# Allegro board remotepanasonicDB9-rout-V2-0.brd
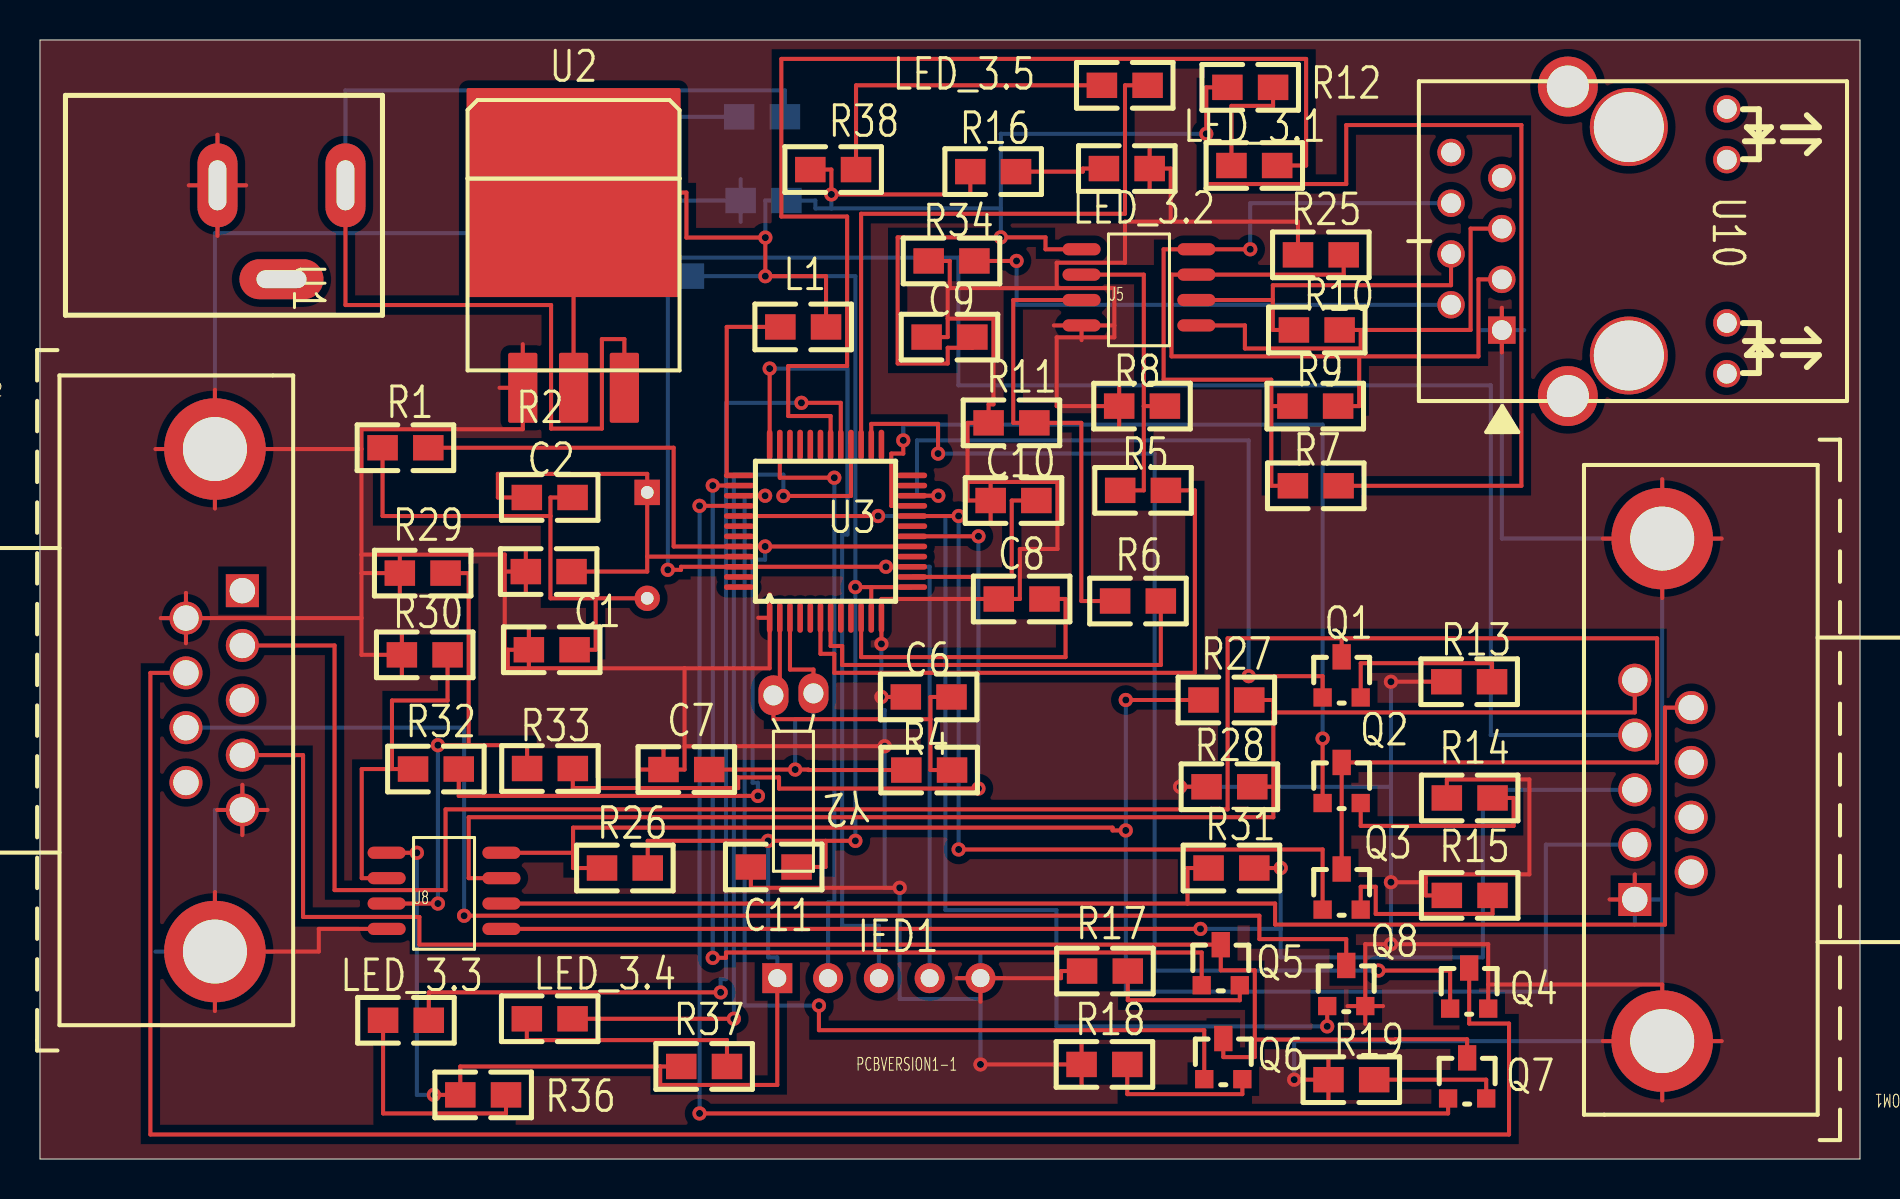
[diagram p0: board, top side]
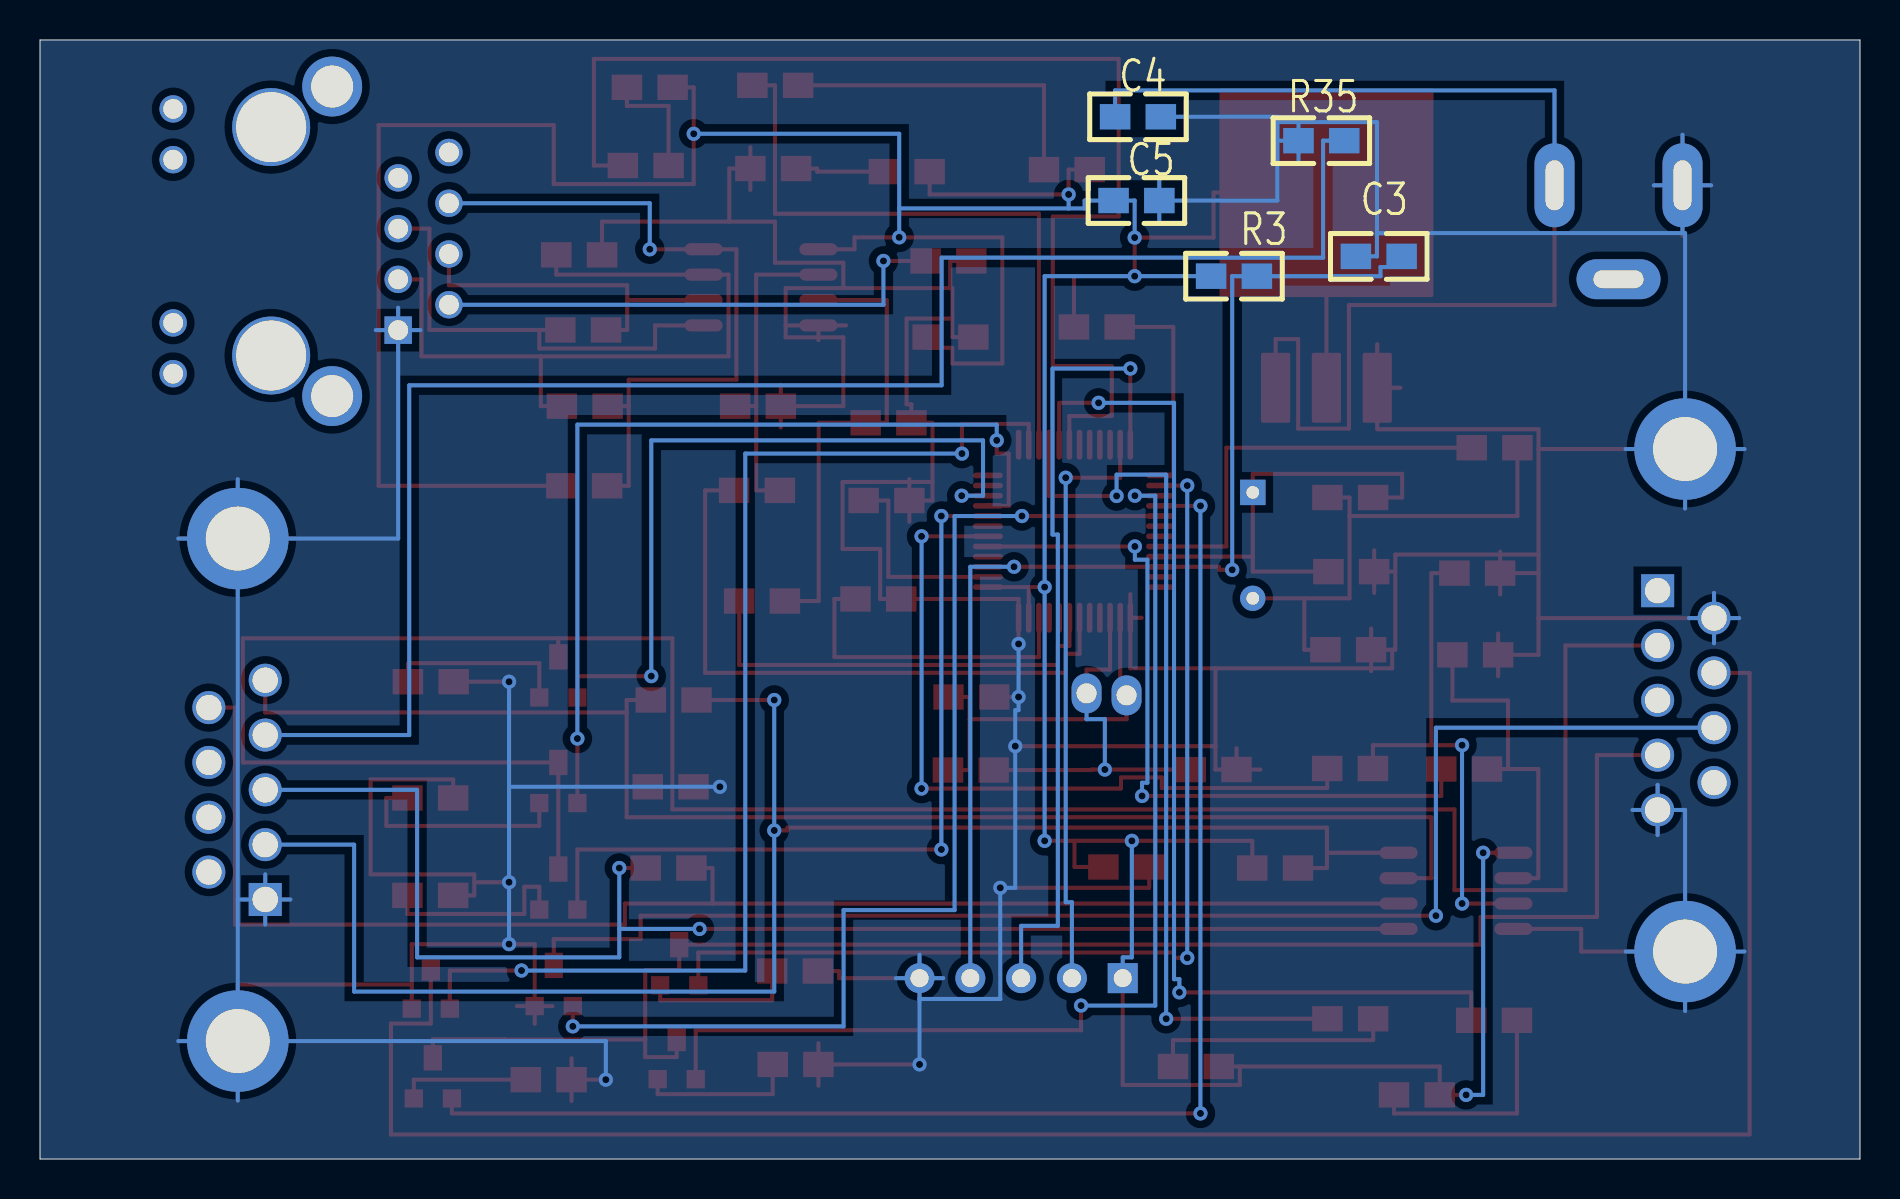
[diagram p1: board, bottom side, seen from below]

Outline 91 x 56 mm; copper layers: TOP, BOTTOM. Coordinates in mm from the lower left corner of the outline.
Outline path: 0,56 91,56 91,0 0,0 0,56

## Placement (name value [footprint] x y rotation side)
C1  20p  [0805]  25.59 25.49 0 top
C2  20p  [0805]  25.43 29.4 0 top
C3  10u  [0805]  24.06 45.17 180 bottom
C4  10u  [0805]  36.1 52.16 180 bottom
C5  22u  [0805]  36.18 47.96 180 bottom
C6  20p  [0805]  44.43 23.12 0 top
C7  20p  [0805]  32.32 19.49 0 top
C8  10u  [0805]  49.08 28.03 0 top
C9  0.1u  [0805]  45.47 41.13 0 top
C10  0.1u  [0805]  48.68 32.95 0 top
C11  0.1u  [0805]  36.69 14.61 0 top
COM1  BOXCONN_DB9  [DB9RA_M]  79.74 18.47 180 top
COM2  BOXCONN_DB9  [DB9RA_M]  10.12 22.96 0 top
IED1  <Value>  [HDR1X5]  36.86 9.05 0 top
L1  R0  [0805]  38.16 41.64 0 top
LED_3.1  RED  [0805]  60.71 49.72 0 top
LED_3.2  RED  [0805]  54.34 49.56 0 top
LED_3.3  RED  [0805]  18.3 6.94 0 top
LED_3.4  RED  [0805]  25.48 7.02 0 top
LED_3.5  RED  [0805]  54.24 53.73 0 top
Q1  2N7002LT1  [SOT23_B]  65.08 24.09 0 top
Q2  2N7002LT1  [SOT23_B]  65.08 18.81 0 top
Q3  2N7002LT1  [SOT23_B]  65.08 13.47 0 top
Q4  2N7002LT1  [SOT23_B]  71.46 8.52 0 top
Q5  2N7002LT1  [SOT23_B]  59.04 9.69 0 top
Q6  2N7002LT1  [SOT23_B]  59.17 4.99 0 top
Q7  2N7002LT1  [SOT23_B]  71.36 4.02 0 top
Q8  2N7002LT1  [SOT23_B]  65.31 8.65 0 top
R1  33  [0805]  18.27 35.59 0 top
R2  1M  [0805]  25.48 33.11 0 top
R3  10k  [0805]  31.3 44.18 180 bottom
R4  10M  [0805]  44.46 19.47 0 top
R5  22  [0805]  55.15 33.46 0 top
R6  22  [0805]  54.9 27.92 0 top
R7  4.7k  [0805]  63.79 33.69 0 top
R8  10k  [0805]  55.1 37.68 0 top
R9  100  [0805]  63.76 37.68 0 top
R10  100  [0805]  63.84 41.49 0 top
R11  10k  [0805]  48.57 36.84 0 top
R12  330  [0805]  60.51 53.63 0 top
R13  4.7k  [0805]  71.46 23.89 0 top
R14  10k  [0805]  71.48 18.07 0 top
R15  15k  [0805]  71.48 13.19 0 top
R16  330  [0805]  47.66 49.41 0 top
R17  4.7k  [0805]  53.25 9.41 0 top
R18  10k  [0805]  53.22 4.73 0 top
R19  15k  [0805]  65.57 3.97 0 top
R25  4.7k  [0805]  64.04 45.25 0 top
R26  4.7k  [0805]  29.24 14.56 0 top
R27  100  [0805]  59.32 22.97 0 top
R28  4.7k  [0805]  59.47 18.63 0 top
R29  10k  [0805]  19.13 29.32 0 top
R30  10k  [0805]  19.24 25.23 0 top
R31  100  [0805]  59.57 14.56 0 top
R32  22  [0805]  19.8 19.52 0 top
R33  22  [0805]  25.5 19.54 0 top
R34  0  [0805]  45.58 44.94 0 top
R35  0  [0805]  26.93 50.96 180 bottom
R36  330  [0805]  22.16 3.21 0 top
R37  330  [0805]  33.21 4.63 0 top
R38  330  [0805]  39.66 49.51 0 top
U1  DC205A  [DC205]  15.27 48.73 270 top
U2  AMS1086CM-3.3  [TO262]  26.68 45.09 0 top
U3  NUC122LC1AN  [NUC122LQFP48]  36.48 27.09 0 top
U5  MAX3488  [SOP8]  52.08 45.53 0 top
U8  MAX3488  [SOP8]  17.33 15.33 0 top
U10  RJ45  [HR911105A]  68.94 45.93 270 top
Y1  12M  [XALTDIP2]  30.36 33.36 270 top
Y2  32k  [XTAL-3_4MM-2P]  38.97 23.4 180 top

## Library data of the parts
C1-C3 C6-C11 = CAPACITOR NON-POL
C4 C5 = CAP NP
COM1 COM2 = CONNECTOR DB9_1
IED1 = CON5
L1 R1-R11 R13-R15 R17-R19 R25-R35 = R
LED_3.1-LED_3.5 = LED
Q1-Q8 = NPN_3
R12 R16 R36-R38 = RES1
U1 = DC205A
U2 = AMS1117: Tolerance: RichardLC; User Part Number: pn
U3 = NUC122LC1AN
U5 U8 = MAX485
U10 = RJ45
Y1 Y2 = CRYSTAL

## Footprints (pads in the part's own frame, mm; a bottom-side part is the same pattern mirrored in y, then rotated)
0805
  rect 1.524x1.27 smd: 1(-1.143,0) 2(1.143,0)
DB9RA_M
  rect 1.651x1.651 hole 1.27: 1(0,5.486)
  round 1.651 hole 1.27: 2(0,2.743) 3(0,0) 4(0,-2.743) 5(0,-5.486) 6(-2.819,4.115) 7(-2.819,1.372) 8(-2.819,-1.372) 9(-2.819,-4.115)
  round 5.08 hole 3.2: 10(-1.372,12.573) 11(-1.372,-12.573)
DC205
  oval 4.2x2 hole 2.5x0.889: 1(0,0) 2(0,-6.4)
  oval 2x4.2 hole 0.889x2.5: 3(4.7,-3.2)
HDR1X5
  rect 1.5x1.5 hole 0.9: 1(0,0)
  round 1.5 hole 0.9: 2(2.54,0) 3(5.08,0) 4(7.62,0) 5(10.16,0)
HR911105A
  round 3.9 hole 3.5 unplated: (-5.707,10.498) (5.723,10.498)
  rect 1.372x1.372 hole 0.991: 1(4.453,4.148)
  round 1.372 hole 0.991: 2(3.183,1.608) 3(1.913,4.148) 4(0.643,1.608) 5(-0.627,4.148) 6(-1.897,1.608) 7(-3.167,4.148) 8(-4.437,1.608) 9(6.633,15.398) 10(4.093,15.398) 11(-4.077,15.398) 12(-6.617,15.398)
  round 2.997 hole 2.1: M3(-7.737,7.448) M4(7.753,7.448)
NUC122LQFP48
  oval 0.279x1.5 smd: 1(0,0) 2(0.508,0) 3(1.016,0) 4(1.524,0) 5(2.032,0) 6(2.54,0) 7(3.048,0) 8(3.556,0) 9(4.064,0) 10(4.572,0) 11(5.08,0) 12(5.588,0) 25(5.588,8.66) 26(5.08,8.66) 27(4.572,8.66) 28(4.064,8.66) 29(3.556,8.66) 30(3.048,8.66) 31(2.54,8.66) 32(2.032,8.66) 33(1.524,8.66) 34(1.016,8.66) 35(0.508,8.66) 36(0,8.66)
  oval 1.5x0.279 smd: 13(7.124,1.536) 14(7.124,2.044) 15(7.124,2.552) 16(7.124,3.06) 17(7.124,3.568) 18(7.124,4.076) 19(7.124,4.584) 20(7.124,5.092) 21(7.124,5.6) 22(7.124,6.108) 23(7.124,6.616) 24(7.124,7.124) 37(-1.536,7.124) 38(-1.536,6.616) 39(-1.536,6.108) 40(-1.536,5.6) 41(-1.536,5.092) 42(-1.536,4.584) 43(-1.536,4.076) 44(-1.536,3.568) 45(-1.536,3.06) 46(-1.536,2.552) 47(-1.536,2.044) 48(-1.536,1.536)
SOP8
  oval 1.905x0.61 smd: 1(0,0) 2(0,-1.27) 3(0,-2.54) 4(0,-3.81) 5(5.74,-3.81) 6(5.74,-2.54) 7(5.74,-1.27) 8(5.74,0)
SOT23_B
  rect 0.914x1.27 smd: D(0,1.041)
  rect 0.914x0.914 smd: G(-0.953,-0.991) S(0.953,-0.991)
TO262
  custom 1.46x3.5 smd: 1(-2.54,-6.5) 2(0,-6.5) 3(2.54,-6.5)
  custom 10.7x10.46 smd: 4(0,3.27)
XALTDIP2
  rect 1.27x1.27 hole 0.635: 1(0,0)
  round 1.27 hole 0.635: 2(5.3,0)
XTAL-3_4MM-2P
  oval 1.5x2 hole 1: 1(0.3,0.1) 2(2.3,0.2)

## Nets
GND: C1.1 C2.1 C3.1 C4.2 C5.2 C6.1 C7.1 C8.1 C9.1 C10.1 C11.1 COM1.1 COM1.10 COM1.11 COM2.5 COM2.6 COM2.10 COM2.11 IED1.5 LED_3.2.2 Q4.S Q8.S R8.1 R11.1 R13.1 R14.1 R15.1 R17.1 R18.1 R19.1 R25.1 R28.1 R29.1 R30.1 R34.1 R35.1 U1.2(GND) U2.1(GND) U3.1(PVSS) U3.12(VSS) U5.4(GND) U8.4(GND) U10.1
VCC: C5.1 C9.2 C11.2 IED1.1 L1.2 R3.1 R7.2 R12.1 R16.1 R26.2 R36.1 R37.1 R38.1 U2.2(VOUT) U2.4(TAB) U3.11(VDD) U3.13(VBUS) U5.1(VCC) U8.1(VCC)
VCC5: C4.1 U1.1(VCC) U2.3(VIN)
422AI: R7.1 R9.1 U5.8(A) U10.6
422AO: COM1.2 R26.1 R27.1 U8.8(A)
422BI: R9.2 R25.2 U5.7(B) U10.3
422BO: COM1.5 R27.2 R28.2 U8.7(B)
422YI: R10.2 U5.5(Y) U10.5
422YO: COM1.3 R31.2 U8.5(Y)
422ZI: R10.1 U5.6(Z) U10.4
422ZO: COM1.9 R31.1 U8.6(Z)
A_AUDIO: COM2.7 Q4.D
A_AUDIO-1: COM2.8 Q8.D
A_INPUT: Q4.G U3.26(PC12)
A_INPUT1: Q8.G U3.41(PD3)
B_AUDIO: COM2.2 Q1.D Q2.D Q3.D
B_AUDIO-1: COM2.4 Q5.D Q6.D Q7.D
B_NET1: Q1.G U3.22(PC0/SPISS00)
B_NET2: Q2.G U3.21(PC1/SPICLK0)
B_NET3: Q3.G U3.20(PC2/MISO00)
B_NET11: Q5.G U3.38(PD0)
B_NET21: Q6.G U3.39(PD1)
B_NET31: Q7.G U3.40(PD2)
ICECLK: IED1.3 U3.36(ICE_CK)
ICEDATA: IED1.2 U3.35(ICE_DAT)
ICEREST: C3.2 IED1.4 R3.2 U3.46(/RESET)
PC8: LED_3.1.2 U3.30(PC8/SPISS10)
PC9: LED_3.3.2 U3.29(PC9/SPICLK1)
PC10: LED_3.4.2 U3.28(PC10/MISO10)
PC11: LED_3.5.2 U3.27(PC11/MOS110)
RXI: R5.1 R8.2 U5.2(RO)
RXO: R30.2 R32.1 U8.2(RO)
TXI: R6.1 R11.2 U5.3(DI)
TXO: R29.2 R33.1 U8.3(DI)
N5217252: C1.2 R1.1 R2.2 Y1.2
N5217271: C2.2 R2.1 U3.45(XT1_IN) Y1.1
N5217301: R1.2 U3.44(XT1_OUT)
N5217606: L1.1 U3.37(AVDD)
N5217811: C6.2 R4.2 U3.2(X32O) Y2.2
N5217823: C7.2 R4.1 U3.3(X321) Y2.1
N5218166: R5.2 U3.6(RXD1/PB4)
N5218170: R6.2 U3.7(TXD1/PB5)
N5218267: C8.2 U3.10(LDO)
N5218423: C10.2 U3.14(VDD33)
N5271660: Q1.S R13.2
N5271664: Q2.S R14.2
N5271668: Q3.S R15.2
N5281203: Q5.S R17.2
N5281215: Q7.S R19.2
N5281219: Q6.S R18.2
N5286003: R32.2 U3.17(PB0/RXD0)
N5286012: R33.2 U3.18(PB1/TXD0)
N5287388: R34.2 U10.2
N5287624: COM1.4 R35.2
N5294368: COM2.3
N52191170: LED_3.2.1 R16.2
N52191690: LED_3.1.1 R12.2
N52878630: LED_3.3.1 R36.2
N52879570: LED_3.4.1 R37.2
N52880520: LED_3.5.1 R38.2

Pads without a net: COM1 6 7 8; COM2 1 9; U1 3; U3 4 5 8 9 15 16 19 23 24 25 31 32 33 34 42 43 47 48; U10 7 8 9 10 11 12 M3 M4

## Via types
v1: diameter 0.711, hole 0.356, TOP to BOTTOM, 58 vias

## Routing (per net, layer and track width the routed paths; a pad name or vN(x,y) marks a point on that pad's centre or on a via; arc(x,y) is an arc through that point)
GND: length 583.2
  TOP w0.203: COM1.10 84.08,5.9 ; COM1.10 78.14,5.9 ; COM1.10 81.11,2.93 ; COM1.10 81.11,8.73 72.41,8.73 ; 53.96,36.61 R8.1 ; R8.1 53.96,38.74 ; R8.1 50.83,37.68 50.83,41.12 53.72,41.12 53.72,41.72 ; 8.75,32.56 COM2.10 ; COM2.10 8.75,38.5 ; COM2.10 5.77,35.53 ; COM2.10 16.07,35.53 ; 78.48,12.99 COM1.1 79.74,14.25 ; 23.39,25.49 23.24,25.49 23.24,29.4 ; 23.39,25.49 C1.1 ; 23.39,25.49 23.39,24.56 32.23,24.56 ; v1(42.99,13.57) 35.54,13.57 C11.1 ; COM2.5 10.12,18.73 ; COM2.5 10.12,16.21 ; COM2.5 8.86,17.47 ; COM2.5 11.38,17.47 ; 32.23,20.66 32.23,19.49 C7.1 ; 32.23,20.66 v1(42.24,20.66) ; 32.23,20.66 32.23,24.56 ; 69.29,13.85 69.29,13.19 R15.1 ; 69.29,13.85 v1(67.55,13.85) ; 69.29,13.85 69.29,14.25 74.47,14.25 74.47,19 70.34,19 R14.1 ; 32.23,24.56 36.48,24.56 U3.1 ; R25.1 62.9,46.91 56.54,46.91 ; C9.1 45.39,41.13 45.39,42.06 ; C2.1 23.24,29.4 ; C2.1 24.29,28.33 ; C2.1 24.29,30.46 ; 23.24,29.4 23.24,30.25 16.07,30.25 ; R29.1 17.99,30.39 ; R29.1 17.99,28.25 ; R29.1 16.07,29.32 ; LED_3.2.2 55.48,50.63 ; LED_3.2.2 55.48,48.5 ; LED_3.2.2 56.54,49.56 56.54,46.91 ; 78.14,31.05 COM1.11 ; COM1.11 81.11,34.02 ; COM1.11 81.11,28.08 ; COM1.11 84.08,31.05 ; 22.98,38.59 U2.1 ; U2.1 24.14,40.78 ; U2.1 24.14,36.52 16.07,36.52 16.07,35.53 ; R18.1 52.08,5.8 ; R18.1 v1(47.02,4.73) ; R18.1 52.08,3.67 ; 7.3,25.81 COM2.6 ; COM2.6 7.3,28.33 ; COM2.6 16.07,27.07 ; COM2.6 6.04,27.07 ; U3.1 36.48,28.27 ; U3.1 35.91,27.09 ; Q8.S 66.26,10.75 v1(67.55,10.75) 72.41,10.75 72.41,8.73 ; Q8.S 65.38,7.65 ; Q8.S 67.15,7.65 ; Q8.S 66.26,6.77 ; 56.54,46.91 54.25,46.91 54.25,44.85 50.83,44.85 50.83,43.58 ; U1.2 8.87,51.26 ; U1.2 8.87,46.19 ; U1.2 7.44,48.73 ; U1.2 10.31,48.73 ; R17.1 51.05,9.41 51.05,9.05 IED1.5 ; 24.44,24.42 C1.1 ; C1.1 24.44,26.55 ; 45.49,43.58 45.49,44.94 R34.1 ; 45.49,43.58 50.83,43.58 ; 45.49,43.58 45.39,43.58 45.39,42.06 ; C7.1 31.17,20.56 ; C7.1 29.98,19.49 ; 46.38,33.88 46.38,32.95 C10.1 ; 46.38,33.88 50.87,33.88 50.87,30.53 48.99,30.53 48.99,28.03 C8.1 42.07,28.03 U3.12 v1(42.07,25.78) ; 46.38,33.88 46.38,36.84 R11.1 47.43,37.77 47.67,37.77 47.67,42.06 45.39,42.06 ; 16.07,30.25 16.07,29.32 ; 16.07,30.25 16.07,35.53 ; 53.72,41.72 53.72,43.58 50.83,43.58 ; 53.72,41.72 U5.4 ; R30.1 18.09,26.3 ; R30.1 16.07,25.23 16.07,27.07 ; R30.1 18.09,24.16 ; 45.84,9.05 IED1.5 ; IED1.5 47.02,7.87 ; R19.1 64.42,5.04 ; R19.1 v1(62.71,3.97) ; R19.1 64.42,2.9 ; 16.07,27.07 16.07,29.32 ; COM2.11 13.94,10.38 13.94,11.52 U8.4 ; COM2.11 8.75,7.41 ; COM2.11 8.75,13.35 ; 73.09,42.6 U10.1 73.09,40.36 ; C10.1 47.53,31.89 ; C10.1 47.53,34.02 ; C6.1 v1(42.07,23.12) ; 72.41,8.73 Q4.S ; R28.1 v1(57.01,18.63) ; 52.08,40.98 U5.4 ; U5.4 50.69,41.72 ; R13.1 v1(67.55,23.89)
  BOTTOM w0.203: COM2.5 10.12,18.73 ; COM2.5 11.38,17.47 ; COM2.5 8.75,17.47 COM2.11 ; COM2.5 10.12,16.21 ; IED1.5 47.02,10.23 ; IED1.5 45.84,9.05 ; IED1.5 47.02,8.01 ; IED1.5 48.21,9.05 ; 47.02,8.01 v1(47.02,4.73) ; 47.02,8.01 42.99,8.01 v1(42.99,13.57) 42.24,13.57 v1(42.24,20.66) 42.24,22.46 42.07,22.46 v1(42.07,23.12) v1(42.07,25.78) ; COM1.10 81.11,12.99 ; COM1.10 84.08,5.9 ; COM1.10 62.71,5.9 v1(62.71,3.97) ; COM1.10 81.11,2.93 ; 81.11,12.99 COM1.11 ; 81.11,12.99 COM1.1 ; U10.1 74.21,41.48 ; U10.1 71.97,41.48 ; U10.1 73.09,31.05 COM1.11 ; U10.1 73.09,42.6 ; 8.87,46.33 U1.2 ; 8.87,46.33 8.75,46.33 COM2.10 ; 8.87,46.33 24.15,46.33 ; U1.2 8.87,51.26 ; U1.2 10.31,48.73 ; U1.2 7.44,48.73 ; COM1.11 84.08,31.05 ; COM1.11 81.11,34.02 ; COM2.6 7.3,28.33 ; COM2.6 7.3,25.81 ; COM2.6 6.04,27.07 ; COM2.6 8.56,27.07 ; COM1.1 79.74,14.25 ; COM1.1 78.48,12.99 ; COM1.1 79.74,11.73 ; 35.04,46.9 C5.2 ; C5.2 29.13,47.96 29.13,50.96 ; C5.2 35.04,49.03 ; 5.77,35.53 COM2.10 ; COM2.10 11.72,35.53 ; COM2.10 8.75,32.56 ; R35.1 28.08,52.03 ; R35.1 29.13,50.96 ; R35.1 28.08,49.89 ; 29.13,50.96 29.13,51.89 ; 67.55,18.63 v1(67.55,13.85) v1(67.55,10.75) ; 67.55,18.63 v1(67.55,23.89) ; 67.55,18.63 v1(57.01,18.63) ; COM2.11 8.75,7.41 ; COM2.11 11.72,10.38 ; COM2.11 5.77,10.38 ; 24.15,46.33 24.15,45.17 C3.1 ; 24.15,46.33 24.15,51.89 29.13,51.89 ; 29.13,51.89 29.13,52.16 C4.2
VCC: length 245.8
  TOP w0.203: R16.1 46.52,48.27 v1(39.57,48.27) 39.57,49.51 R38.1 ; IED1.1 36.86,3.7 31.01,3.7 31.01,4.63 ; U3.11 41.56,28.62 ; 41.56,28.62 v1(40.77,28.62) ; 41.56,28.62 U3.13 ; L1.2 39.3,44.18 v1(36.27,44.18) v1(36.27,46.11) 32.32,46.11 32.32,48.36 U2.4 U2.2 ; 39.28,15.92 v1(36.41,15.92) 30.39,15.92 R26.2 ; 39.28,15.92 39.28,14.61 C11.2 ; 39.28,15.92 v1(40.77,15.92) ; R7.2 74.07,33.69 74.07,51.74 65.31,51.74 65.31,48.79 58.31,48.79 v1(58.31,51.3) 58.31,53.63 R12.1 ; R37.1 31.01,4.63 ; 31.01,4.63 21.01,4.63 R36.1 v1(19.69,3.21) ; U8.1 v1(18.84,15.33) ; U5.1 50.28,45.53 50.28,46.12 v1(48.04,46.12) 42.88,46.12 42.88,39.81 45.39,39.81 45.39,40.6 46.62,40.6 C9.2
  BOTTOM w0.203: v1(19.69,3.21) 18.84,3.21 v1(18.84,15.33) ; v1(36.27,46.11) 36.27,47.96 C5.1 38.77,47.96 38.77,47.57 39.57,47.57 ; v1(48.04,46.12) 48.04,47.57 ; 48.04,47.57 48.04,51.3 v1(58.31,51.3) ; 48.04,47.57 39.57,47.57 ; v1(36.41,15.92) 36.41,10.09 36.86,10.09 IED1.1 ; v1(40.77,15.92) v1(40.77,28.62) 40.77,44.18 v1(36.27,44.18) R3.1 ; 39.57,47.57 v1(39.57,48.27)
VCC5: length 61.1
  TOP w0.203: U2.3 29.22,41.03 28.09,41.03 28.09,36.55 25.55,36.55 25.55,42.73 15.27,42.73 U1.1
  BOTTOM w0.203: 37.25,52.16 37.25,53.48 15.27,53.48 U1.1
422AI: length 36
  TOP w0.203: R9.1 61.57,37.68 ; 61.57,37.68 61.57,39 56.18,39 56.18,45.53 v1(60.51,45.53) ; 61.57,37.68 61.57,33.69 R7.1
  BOTTOM w0.203: U10.6 60.51,47.83 v1(60.51,45.53)
422AO: length 86.1
  TOP w0.203: 26.65,15.33 26.65,16.58 53.63,16.58 53.63,16.44 v1(54.29,16.44) ; 26.65,15.33 26.65,14.56 R26.1 ; 26.65,15.33 U8.8 ; R27.1 v1(54.29,22.97)
  BOTTOM w0.203: v1(54.29,22.97) v1(54.29,16.44) 54.29,8.38 75.29,8.38 75.29,15.73 COM1.2
422BI: length 37.6
  TOP w0.203: U10.3 71.92,44.02 71.92,40.17 65.96,40.17 ; 65.19,45.25 65.19,44.26 56.57,44.26 56.57,40.17 65.96,40.17 ; 65.96,40.17 65.96,37.68 R9.2
422BO: length 72.7
  TOP w0.203: U8.7 21.43,14.06 21.43,17.1 61.67,17.1 61.67,18.63 ; 61.67,18.63 61.67,22.35 ; 61.67,18.63 60.61,18.63 ; 61.67,22.35 61.67,22.97 R27.2 ; 61.67,22.35 79.74,22.35 COM1.5
422YI: length 23.5
  TOP w0.203: 66.04,41.49 66.04,40.56 60.24,40.56 60.24,41.72 57.82,41.72 ; 66.04,41.49 R10.2 ; 66.04,41.49 71.53,41.49 71.53,46.56 U10.5
422YO: length 70.8
  TOP w0.203: R31.2 v1(62.04,14.56) ; U8.5 v1(58.02,11.52)
  BOTTOM w0.203: COM1.3 72.15,18.47 72.15,10.09 62.04,10.09 62.04,11.52 ; v1(58.02,11.52) 62.04,11.52 ; 62.04,11.52 v1(62.04,14.56)
422ZI: length 17.6
  TOP w0.203: R10.1 61.64,41.49 61.64,42.99 ; U10.4 70.55,43.73 61.64,43.73 61.64,42.99 ; 61.64,42.99 57.82,42.99
422ZO: length 74.2
  TOP w0.203: U8.6 57.37,12.79 ; 57.37,12.79 57.37,14.56 R31.1 ; 57.37,12.79 61.76,12.79 61.76,11.73 81.25,11.73 81.25,22.59 COM1.9
A_AUDIO: length 103.1
  TOP w0.203: COM2.7 5.52,24.33 5.52,1.23 73.45,1.23 73.45,6.78 71.46,6.78 Q4.D
A_AUDIO-1: length 69.9
  TOP w0.203: v1(21.2,12.18) 60.97,12.18 60.97,11.01 65.31,11.01 Q8.D
  BOTTOM w0.203: v1(21.2,12.18) 21.2,21.58 COM2.8
A_INPUT: length 59.2
  TOP w0.203: Q4.G 70.51,9.43 v1(66.92,9.43) ; v1(44.9,35.3) 44.9,36.79 41.56,36.79 U3.26
  BOTTOM w0.203: v1(44.9,35.3) 55.74,35.3 55.74,9.43 v1(66.92,9.43)
A_INPUT1: length 56
  TOP w0.203: U3.41 v1(41.9,32.18) ; Q8.G v1(64.36,6.64)
  BOTTOM w0.203: v1(64.36,6.64) 50.82,6.64 50.82,12.46 45.27,12.46 45.27,32.18 v1(41.9,32.18)
B_AUDIO: length 123.8
  TOP w0.203: COM2.2 14.73,25.7 14.73,13.46 20.28,13.46 20.28,17.5 59.38,17.5 59.38,26.06 65.08,26.06 ; 65.08,26.06 Q1.D ; 65.08,26.06 80.86,26.06 80.86,19.85 Q2.D Q3.D
B_AUDIO-1: length 79.8
  TOP w0.203: Q7.D 71.36,5.99 67.78,5.99 67.78,5.98 60.74,5.98 ; COM2.4 13.15,20.21 13.15,12.11 18.97,12.11 18.97,10.73 Q5.D 59.04,9.45 60.74,9.45 60.74,5.98 ; 60.74,5.98 60.74,5.1 59.17,5.1 Q6.D
B_NET1: length 38.3
  TOP w0.203: v1(60.44,24.16) 64.13,24.16 Q1.G ; U3.22 v1(44.92,33.19)
  BOTTOM w0.203: v1(44.92,33.19) 43.85,33.19 43.85,35.96 60.44,35.96 v1(60.44,24.16)
B_NET2: length 45.6
  TOP w0.203: U3.21 42.56,32.69 42.56,35.3 43.16,35.3 v1(43.16,35.96) ; Q2.G v1(64.13,21.04)
  BOTTOM w0.203: v1(43.16,35.96) 43.16,36.75 64.13,36.75 v1(64.13,21.04)
B_NET3: length 40.2
  TOP w0.203: v1(45.93,15.49) 64.13,15.49 Q3.G ; U3.20 v1(45.93,32.18)
  BOTTOM w0.203: v1(45.93,32.18) v1(45.93,15.49)
B_NET11: length 51.3
  TOP w0.203: v1(33.64,10.07) 34.3,10.07 34.3,10.33 58.09,10.33 Q5.G ; U3.38 v1(33.64,33.7)
  BOTTOM w0.203: v1(33.64,33.7) v1(33.64,10.07)
B_NET21: length 54.5
  TOP w0.203: v1(38.95,7.68) 38.95,6.45 58.21,6.45 Q6.G ; U3.39 v1(36.26,33.19)
  BOTTOM w0.203: v1(36.26,33.19) 35.24,33.19 35.24,7.68 v1(38.95,7.68)
B_NET31: length 70.5
  TOP w0.203: U3.40 v1(32.98,32.69) ; Q7.G 70.4,2.28 v1(32.98,2.28)
  BOTTOM w0.203: v1(32.98,32.69) v1(32.98,2.28)
ICECLK: length 40.3
  TOP w0.203: U3.36 v1(36.48,39.56)
  BOTTOM w0.203: v1(36.48,39.56) 40.37,39.56 40.37,31.25 40.11,31.25 40.11,11.67 41.94,11.67 IED1.3
ICEDATA: length 29.7
  TOP w0.203: v1(39.71,34.09) 36.99,34.09 U3.35
  BOTTOM w0.203: IED1.2 39.4,12.85 39.71,12.85 v1(39.71,34.09)
ICEREST: length 58
  TOP w0.203: v1(42.3,29.64) U3.46 32.05,29.64 32.05,29.49 v1(31.39,29.49)
  BOTTOM w0.203: v1(42.3,29.64) 44.48,29.64 IED1.4 ; C3.2 22.92,44.64 23.97,44.64 23.97,44.18 R3.2 31.39,44.18 v1(31.39,29.49)
PC8: length 60.7
  TOP w0.203: LED_3.1.2 63.31,49.72 63.31,55.05 37.07,55.05 37.07,47.16 40.36,47.16 40.36,39.68 37.41,39.68 37.41,37.18 39.53,37.18 U3.30
PC9: length 53.6
  TOP w0.203: v1(38.07,37.84) 40.04,37.84 U3.29 ; LED_3.3.2 19.44,8.34 v1(34.03,8.34)
  BOTTOM w0.203: v1(38.07,37.84) 34.3,37.84 34.3,9 34.03,9 v1(34.03,8.34)
PC10: length 44.8
  TOP w0.203: LED_3.4.2 v1(34.69,7.02) ; U3.28 40.55,33.18 v1(37.17,33.18)
  BOTTOM w0.203: v1(37.17,33.18) 37.17,34.25 34.69,34.25 v1(34.69,7.02)
PC11: length 32.3
  TOP w0.203: U3.27 41.06,47.3 54.25,47.3 54.25,53.73 LED_3.5.2
RXI: length 16.1
  TOP w0.203: R5.1 55.19,33.46 55.19,37.68 ; 55.19,37.68 55.19,44.26 U5.2 ; 55.19,37.68 R8.2
RXO: length 17.8
  TOP w0.203: 17.6,19.52 17.6,22.95 20.38,22.95 R30.2 ; 17.6,19.52 R32.1 ; 17.6,19.52 16.09,19.52 16.09,14.06 U8.2
TXI: length 23.6
  TOP w0.203: U5.3 48.66,42.99 48.66,36.84 R11.2 52.07,36.84 52.07,27.92 53.76,27.92
TXO: length 25.9
  TOP w0.203: R29.2 21.43,29.32 21.43,20.71 ; R33.1 24.35,20.71 21.43,20.71 ; 21.43,20.71 v1(19.9,20.71) ; U8.3 v1(19.9,12.79)
  BOTTOM w0.203: v1(19.9,12.79) v1(19.9,20.71)
N5217252: length 26.4
  TOP w0.203: C1.2 27.78,25.49 27.78,28.06 ; 27.78,28.06 25.52,28.06 25.52,32.18 ; 27.78,28.06 Y1.2 ; R2.2 25.52,33.11 25.52,32.18 ; 25.52,32.18 17.13,32.18 R1.1
N5217271: length 23.4
  TOP w0.203: 30.36,30.15 Y1.1 30.36,34.29 22.89,34.29 22.89,33.11 R2.1 ; 30.36,30.15 U3.45 ; 30.36,30.15 30.36,29.4 C2.2
N5217301: length 20.5
  TOP w0.203: U3.44 31.68,30.65 31.68,35.59 R1.2
N5217606: length 10.7
  TOP w0.203: U3.37 34.34,34.21 34.34,41.64 L1.1
N5217811: length 19
  TOP w0.203: R4.2 44.52,19.47 44.52,22.01 ; U3.2 36.99,23.2 Y2.2 36.67,22.01 44.52,22.01 ; 44.52,22.01 44.52,23.12 C6.2
N5217823: length 19.6
  TOP w0.203: R4.1 38.42,19.47 38.42,19.49 v1(37.76,19.49) C7.2 ; Y2.1 38.67,24.49 37.5,24.49 U3.3
  BOTTOM w0.203: Y2.1 38.67,22.01 37.76,22.01 v1(37.76,19.49)
N5218166: length 32.1
  TOP w0.203: U3.6 39.02,25.28 39.71,25.28 39.71,24.33 57.74,24.33 57.74,33.46 R5.2
N5218170: length 22.1
  TOP w0.203: R6.2 56.04,24.72 40.11,24.72 40.11,25.68 39.53,25.68 U3.7
N5218267: length 16.2
  TOP w0.203: U3.10 41.06,25.12 51.28,25.12 51.28,28.03 C8.2
N5218423: length 10
  TOP w0.203: C10.2 48.59,32.95 48.59,29.13 U3.14
N5271660: length 9.2
  TOP w0.203: R13.2 72.6,24.81 66.04,24.81 Q1.S
N5271664: length 11.2
  TOP w0.203: Q2.S 66.04,16.67 73.68,16.67 73.68,18.07 R14.2
N5271668: length 10
  TOP w0.203: Q3.S 66.04,13.62 66.79,13.62 66.79,12.26 72.63,12.26 R15.2
N5281203: length 7.8
  TOP w0.203: R17.2 54.39,7.95 59.99,7.95 Q5.S
N5281215: length 6.5
  TOP w0.203: Q7.S 72.31,3.97 R19.2
N5281219: length 8
  TOP w0.203: R18.2 54.36,3.25 60.12,3.25 Q6.S
N5286003: length 37
  TOP w0.203: v1(35.9,18.17) 20.94,18.17 R32.2 ; U3.17 v1(36.26,30.65)
  BOTTOM w0.203: v1(35.9,18.17) 35.9,18.83 35.63,18.83 35.63,29.99 36.26,29.99 v1(36.26,30.65)
N5286012: length 38.3
  TOP w0.203: R33.2 26.64,18.56 34.91,18.56 34.91,19.1 36.95,19.1 36.95,18.54 v1(46.92,18.54) ; U3.18 v1(46.92,31.16)
  BOTTOM w0.203: v1(46.92,31.16) v1(46.92,18.54)
N5287388: length 26
  TOP w0.203: R34.2 v1(48.83,44.94)
  BOTTOM w0.203: U10.2 48.83,42.75 v1(48.83,44.94)
N5287624: length 83.7
  BOTTOM w0.203: R35.2 26.84,50.96 26.84,45.11 45.92,45.11 45.92,38.72 72.54,38.72 72.54,21.22 COM1.4
N52191170: length 4.5
  TOP w0.203: LED_3.2.1 52.14,49.56 52.14,49.41 R16.2
N52191690: length 6
  TOP w0.203: LED_3.1.1 59.57,52.7 61.65,52.7 R12.2
N52878630: length 11.7
  TOP w0.203: R36.2 23.3,2.28 17.15,2.28 LED_3.3.1
N52879570: length 12.4
  TOP w0.203: R37.2 34.35,5.95 24.34,5.95 LED_3.4.1
N52880520: length 16.5
  TOP w0.203: R38.2 40.8,53.73 LED_3.5.1

## Copper pours and planes (outline as drawn; the poured copper is in the pictures)
GND on TOP: 0,0 0,56 91,56 91,0 ; 49 cut-outs
GND on BOTTOM: 0,0 0,56 91,56 91,0 ; 3 cut-outs

## Text on the board
Ref Des/Silkscreen Top: PCBVERSION1-1
COMPVAL_TYPE_TOP: FIGURE | SIZE | 14.0 | 25.0 | 35.43 | 39.0 | 39.37 | 50.0 | 82.68 | 126.0 | 137.8 | 98.42x35.0 | DRILL CHART: TOP to BOTTOM | ALL UNITS ARE IN MILS | PLATED | NON-PLATED | QTY | 58 | 2 | 5 | 1 | 11 | 18 | 4
